# EAGLE board parts_servo (EAGLE 6.5.0)
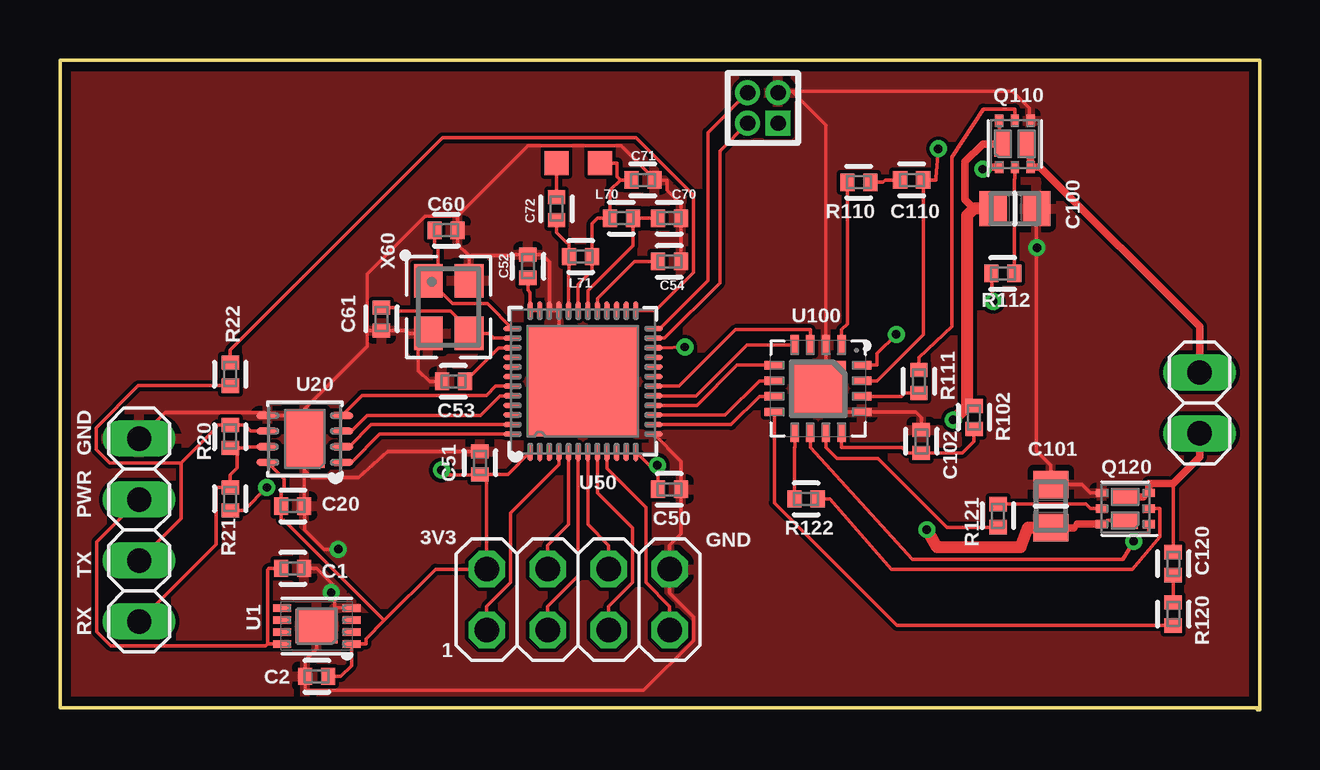
[diagram p0: board, top side]
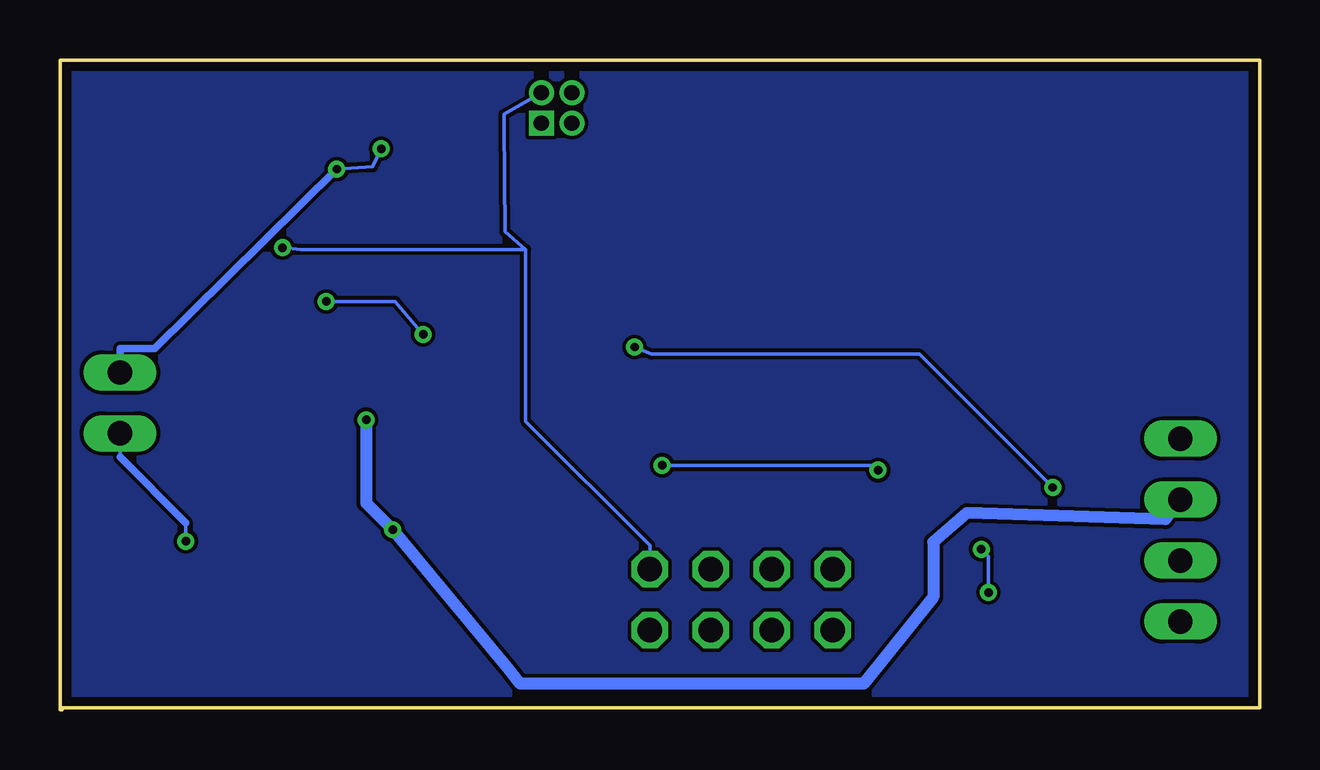
[diagram p1: board, bottom side, seen from below]

Size 50 x 27.1 mm. Coordinates in mm from the lower left corner, seen from the top.
Outline: 50,0.2 50,0.1 0,0.1 0,27.1 50,27.1 50,0 49.9,0
Copper layers (1*16): Top 0.0356mm / dielectric 1.5011mm / Bottom 0.0356mm
Design rules "LaenPCBOrder": minimum track width 6mil, minimum drill 13mil, track to track 6mil, track to pad 6mil, pad to pad 6mil, via to via 6mil, smd to smd 6mil, copper to edge 15mil, drill to drill 6mil, minimum pad ring 7mil, minimum via ring 7mil, stop-mask expansion 3mil, vias tented up to drill 0mil, thermal gap 10mil

## Footprints (pad centres in the part's own frame; a part is rotated, then mirrored left to right if it is on the bottom)
0402-B = smd 0.59 x 0.72: 1 -0.48,0; 2 0.48,0
0805-B = smd 1.15 x 1.45: 1 -0.9,0; 2 0.9,0
1X04 = drill 1.016 long: 1 -3.81,0; 2 -1.27,0; 3 1.27,0; 4 3.81,0
2X04 = drill 1.016 octagon: 1 -3.81,-1.27; 2 -3.81,1.27; 3 -1.27,-1.27; 4 -1.27,1.27; 5 1.27,-1.27; 6 1.27,1.27; 7 3.81,-1.27; 8 3.81,1.27
1X02 = drill 1.016 long: 1 -1.27,0; 2 1.27,0
PINHEADER-2X2-0.05_IN = drill 0.635 pad 1.04 square: 1 -0.635,-0.635 | drill 0.635 pad 1.04: 2 -0.635,0.635; 3 0.635,-0.635; 4 0.635,0.635
DFN-6(2X2)+2EP(TRANSISTOR) = smd 0.5 x 0.35: 1 -0.975,0.65; 2 -0.975,0; 3 -0.975,-0.65; 4 0.975,-0.65; 5 0.975,0; 6 0.975,0.65 | smd 1.05 x 0.72: P7 0,0.49; P8 0,-0.49
TESTPOINT-(1X1)CREAMED = smd 1 x 1: TP 0,0
DFN-8(2X3)+EP = smd 0.75 x 0.3: 1 -1.45,0.75; 2 -1.45,0.25; 3 -1.45,-0.25; 4 -1.45,-0.75; 5 1.45,-0.75; 6 1.45,-0.25; 7 1.45,0.25; 8 1.45,0.75 | smd 1.75 x 1.45: PAD 0,0
DFN-8(3X3)+EP = smd 0.95 x 0.3: 1 -1.55,0.975; 2 -1.55,0.325; 3 -1.55,-0.325; 4 -1.55,-0.975; 5 1.55,-0.975; 6 1.55,-0.325; 7 1.55,0.325; 8 1.55,0.975 | smd 1.65 x 2.4: PAD 0,0
DFN-48(6X6)+EP = smd 0.75 x 0.2: 1 -2.95,2.2; 2 -2.95,1.8; 3 -2.95,1.4; 4 -2.95,1; 5 -2.95,0.6; 6 -2.95,0.2; 7 -2.95,-0.2; 8 -2.95,-0.6; 9 -2.95,-1; 10 -2.95,-1.4; 11 -2.95,-1.8; 12 -2.95,-2.2; 25 2.95,-2.2; 26 2.95,-1.8; 27 2.95,-1.4; 28 2.95,-1; 29 2.95,-0.6; 30 2.95,-0.2; 31 2.95,0.2; 32 2.95,0.6; 33 2.95,1; 34 2.95,1.4; 35 2.95,1.8; 36 2.95,2.2 | smd 0.2 x 0.75: 13 -2.2,-2.95; 14 -1.8,-2.95; 15 -1.4,-2.95; 16 -1,-2.95; 17 -0.6,-2.95; 18 -0.2,-2.95; 19 0.2,-2.95; 20 0.6,-2.95; 21 1,-2.95; 22 1.4,-2.95; 23 1.8,-2.95; 24 2.2,-2.95; 37 2.2,2.95; 38 1.8,2.95; 39 1.4,2.95; 40 1,2.95; 41 0.6,2.95; 42 0.2,2.95; 43 -0.2,2.95; 44 -0.6,2.95; 45 -1,2.95; 46 -1.4,2.95; 47 -1.8,2.95; 48 -2.2,2.95 | smd 4.6 x 4.6: PAD 0,0
QFN-16(4X4)+EP = smd 0.8 x 0.35: 1 -1.825,0.975; 2 -1.825,0.325; 3 -1.825,-0.325; 4 -1.825,-0.975; 9 1.825,-0.975; 10 1.825,-0.325; 11 1.825,0.325; 12 1.825,0.975 | smd 0.35 x 0.8: 5 -0.975,-1.825; 6 -0.325,-1.825; 7 0.325,-1.825; 8 0.975,-1.825; 13 0.975,1.825; 14 0.325,1.825; 15 -0.325,1.825; 16 -0.975,1.825 | smd 2.3 x 2.3: PAD 0,0
CRYSTAL-3.2X2.5(4_TERMINAL) = smd 1.4 x 1.2: 1 -1.1,-0.85; 2 1.1,-0.85; 3 1.1,0.85; 4 -1.1,0.85

## Placement (x,y rotation side)
C1  1  [0402-B]  9.7,5.9 0 top
C2  1  [0402-B]  10.7,1.4 180 top
C20  0.1  [0402-B]  9.7,8.5 0 top
C50  0.1  [0402-B]  25.4,9.2 0 top
C51  0.1  [0402-B]  17.5,10.3 90 top
C52  .001  [0402-B]  19.5,18.5 90 top
C53  0.1  [0402-B]  16.4,13.7 180 top
C54  .047  [0402-B]  25.4,18.7 0 top
C60  8pF  [0402-B]  16.1,20 0 top
C61  8pF  [0402-B]  13.4,16.3 270 top
C70  .0022  [0402-B]  25.4,20.5 0 top
C71  np  [0402-B]  24.3,22.1 0 top
C72  2.2pF  [0402-B]  20.7,20.9 90 top
C100  10  [0805-B]  39.8,20.9 0 top
C101  10  [0805-B]  41.3,8.5 90 top
C102  1  [0402-B]  35.9,11.2 90 top
C110  1  [0402-B]  35.5,22.1 0 top
C120  1  [0402-B]  46.4,6.1 90 top
JP1  I/O  [1X04]  3.3,7.5 270 top
JP2  Sensor  [2X04]  21.6,4.6 0 top
JP3  Motor  [1X02]  47.5,12.8 90 top
JP4  SWD  [PINHEADER-2X2-0.05_IN]  29.3,25.1 90 top
L70  10nH  [0402-B]  23.4,20.5 0 top
L71  4.7nH  [0402-B]  21.7,18.9 0 top
Q110  PMDPB28UN  [DFN-6(2X2)+2EP(TRANSISTOR)]  39.8,23.6 90 top
Q120  PMDPB28UN  [DFN-6(2X2)+2EP(TRANSISTOR)]  44.4,8.4 180 top
R20  120(np)  [0402-B]  7.1,11.4 90 top
R21  4.7k(np)  [0402-B]  7.1,8.8 270 top
R22  4.7k(np)  [0402-B]  7.1,14 90 top
R102  2.2  [0402-B]  38.1,12.2 90 top
R110  1  [0402-B]  33.3,22 0 top
R111  0  [0402-B]  35.8,13.7 90 top
R112  2.2  [0402-B]  39.3,18.2 0 top
R120  1  [0402-B]  46.4,4 90 top
R121  0  [0402-B]  39.1,8.1 90 top
R122  2.2  [0402-B]  31.1,8.8 0 top
TP1  ANT1  [TESTPOINT-(1X1)CREAMED]  22.5,22.8 90 top
TP2  ANT_FEED  [TESTPOINT-(1X1)CREAMED]  20.7,22.8 90 top
U1  MCP1703-3302  [DFN-8(2X3)+EP]  10.7,3.5 180 top
U20  sn65hvd72  [DFN-8(3X3)+EP]  10.2,11.3 180 top
U50  nRF51822  [DFN-48(6X6)+EP]  21.8,13.7 90 top
U100  RT9625A  [QFN-16(4X4)+EP]  31.6,13.4 270 top
X60  CX3225GB16000P0HPQCC  [CRYSTAL-3.2X2.5(4_TERMINAL)]  16.2,16.8 270 top

## Library data of the parts
C1 C100 C101 = rcl_custom; VOLTAGE: 10V
C2 C20 C50-C54 C60 C61 C70-C72 C102 C110 C120 L70 L71 R20-R22 R102 R110-R112 R120-R122 = rcl_custom
JP1-JP3 = pinhead
JP4 Q110 Q120 TP1 TP2 U20 U100 = parts_servo
U1 = parts_servo; VOUT: 3.3V
U50 = parts_servo; SWDIO: (nRST)
X60 = parts_servo; FREQUENCY: 16MHz

## Nets
3.3V: C2.1 C20.1 C50.1 C51.1 JP2.2 U1.1 U20.8 U50.1 U50.12
ANT1: C71.1 L70.1 L71.2 TP1.TP U50.31
ANT2: C72.1 L71.1 U50.32
ANT_FEED: C72.2 TP2.TP
AVDD: C52.1 U50.35 U50.36
BOOT1: R120.1 U100.8
BOOT1_SNUB: C120.1 R120.2
BOOT1_SNUB1: C110.1 R110.2
BOOT2: R110.1 U100.1
D1/TX: JP1.3 R20.2 R22.1 U20.6
D2/RX: JP1.4 R20.1 R21.1 U20.7
DEC1: C53.1 U50.39
DEC2: C54.1 U50.29
DIFFERENTIAL_INPUT: U20.1 U50.48
DIFFERENTIAL_INPUT_EN: U20.2 U50.47
DIFFERENTIAL_OUTPUT: U20.4 U50.43
DIFFERENTIAL_OUTPUT_EN: U20.3 U50.44
GND: C1.2 C2.2 C20.2 C50.2 C51.2 C52.2 C53.2 C54.2 C60.2 C61.2 C70.2 C71.2 C100.2 C101.2 C102.2 JP1.1 JP2.8 JP4.3 Q110.4 Q120.4 U1.4 U1.PAD U20.5 U20.PAD U50.13 U50.33 U50.34 U50.PAD U100.2 U100.13 U100.PAD X60.2 X60.4
HSCLK_IN: C60.1 U50.37 X60.1
HSCLK_OUT: C61.1 U50.38 X60.3
LGATE1: R121.1 U100.11
LGATE2: R111.1 U100.14
MOTOR1: C120.2 JP3.1 Q120.1 Q120.3 Q120.P8 U100.10
MOTOR2: C110.2 JP3.2 Q110.1 Q110.3 Q110.P8 U100.15
POWER_IN: C1.1 C100.1 C101.1 JP1.2 Q110.6 Q110.P7 Q120.6 Q120.P7 R102.2 U1.8
PWM1: U50.15 U100.6
PWM1_EN: U50.16 U100.5
PWM2: U50.18 U100.3
PWM2_EN: U50.17 U100.4
PWM_POR: U50.14 U100.7
PWM_VCC: C102.1 R102.1 U100.12
QLGATE1: Q120.5 R121.2
QLGATE2: Q110.5 R111.2
QUGATE1: Q120.2 R122.2
QUGATE2: Q110.2 R112.2
SENSOR1: JP2.1 U50.4
SENSOR2: JP2.3 U50.6
SENSOR3: JP2.4 U50.5
SENSOR4: JP2.5 U50.8
SENSOR5: JP2.6 U50.7
SENSOR6: JP2.7 U50.9
SWDCLK: JP4.4 U50.24
SWDIO: JP4.2 U50.23
UGATE1: R122.1 U100.9
UGATE2: R112.1 U100.16
UNIPOLAR_INPUT: R21.2 U50.22
UNIPOLAR_OUTPUT: R22.2 U50.25
VDD_PA: C70.1 L70.2 U50.30

## Tracks (layer width: path | path; a pad name or v marks a point on that pad's centre or on a via)
3.3V  (via drill 0.35 pad 0.64)
  Top 0.152: 13.52,3.73 15.65,5.87 16.8,5.87 JP2.2 17.79,6.86 17.79,9.82 | 13.52,3.73 12.75,2.97 12.75,2.75 U1.1 12.15,1.85 11.7,1.4 C2.1 | 13.52,3.73 9.34,7.91 9.22,7.91 C20.1 9.22,9.09 9.34,9.21 9.34,9.64 U20.8 | 19.6,10.84 U50.1 18.67,9.82 17.79,9.82 | 24,10.79 U50.12 24.88,9.88 | 17.79,9.82 C51.1 17.5,9.8 16.1,9.8 16,9.9 15.9,9.9 v15.9,10 | C50.1 24.92,9.83 24.88,9.88 | v24.9,10.2 24.9,9.9 24.88,9.88
  Bottom 0.152: v15.9,10 16.1,10.2 v24.9,10.2
ANT1
  Top 0.152: U50.31 21.6,17.73 22.18,18.31 L71.2 22.18,20.28 22.4,20.5 L70.1 22.92,21.09 22.92,21.66 23.36,22.1 | TP1.TP 23.23,22.8 23.23,22.23 23.36,22.1 | 23.36,22.1 23.4,22.1 C71.1
ANT2
  Top 0.152: U50.32 21.2,18.29 21.22,18.31 L71.1 21.22,19.49 21.11,19.49 20.7,19.9 C72.1
ANT_FEED
  Top 0.152: TP2.TP C72.2
AVDD
  Top 0.152: U50.35 U50.36 19.6,17.4 19.5,17.5 C52.1
BOOT1
  Top 0.152: U100.8 29.77,8.63 34.89,3.52 R120.1
BOOT1_SNUB
  Top 0.152: R120.2 C120.1
BOOT1_SNUB1
  Top 0.152: R110.2 34.3,22 34.4,22.1 C110.1
BOOT2
  Top 0.152: U100.1 32.57,15.85 32.82,16.1 R110.1
D1/TX
  Top 0.152: 5.06,10.29 2.08,10.29 1.52,10.86 1.52,11.77 3.27,13.52 R22.1 | 5.06,10.29 6.51,11.75 6.51,11.88 R20.2 7.69,11.88 7.94,11.62 U20.6 | 5.06,10.29 5.06,7.99 JP1.3
D2/RX
  Top 0.152: 7.39,10.92 7.39,10.1 7.1,9.8 R21.1 6.51,9.28 6.51,6.9 JP1.4 | 7.39,10.92 7.69,10.92 7.74,10.97 U20.7 | R20.1 7.39,10.92
DEC1
  Top 0.152: U50.39 18.28,15.1 C53.1
DEC2
  Top 0.152: C54.1 23.95,18.7 22.4,17.15 U50.29
DIFFERENTIAL_INPUT
  Top 0.152: U50.48 13.33,11.5 12.15,10.32 U20.1
DIFFERENTIAL_INPUT_EN
  Top 0.152: U50.47 12.97,11.9 12.05,10.97 U20.2
DIFFERENTIAL_OUTPUT
  Top 0.152: U50.43 18.16,13.5 17.77,13.11 12.59,13.11 U20.4
DIFFERENTIAL_OUTPUT_EN
  Top 0.152: U50.44 18.35,13.1 17.52,12.28 12.8,12.28 12.15,11.62 11.95,11.62 U20.3
GND  (via drill 0.35 pad 0.64, 0.35 pad 0.69)
  Top 0.152: v40.73,19.27 40.7,19.95 | 24.67,11.5 U50.13 25.88,10.37 C50.2 25.88,7.33 25.41,6.86 JP2.8 25.41,4.88 26.4,3.89 26.4,2.88 24.33,0.81 10.22,0.81 C2.2 10.22,2.07 10.7,2.55 U1.PAD 11.45,4.25 | C51.2 13.65,10.78 12.46,9.69 10.5,9.69 10.18,10 | 40.7,19.95 40.7,10.8 41.3,10.2 C101.2 42.6,9.4 42.95,9.05 Q120.4 | 31.71,13.51 31.92,13.72 U100.2 31.92,18.18 31.92,24.38 30.5,25.8 | U100.PAD 31.71,13.51 | 31.71,13.51 32.8,12.43 U100.13 35.68,12.43 35.9,12.2 C102.2 | 12.81,15.82 | 12.81,15.82 12.81,15.15 9.94,12.28 | 9.94,12.28 9.94,11.56 U20.PAD 10.18,11.28 10.18,10 | 9.94,12.28 U20.5 8.52,12.4 4.39,12.4 JP1.1 | 16.58,20.59 19.52,23.53 23.38,23.53 24.78,22.13 C71.2 25.3,22.1 25.3,21.66 25.88,21.09 C70.2 C54.2 | 17.05,18.94 16.58,19.41 C60.2 16.58,20.59 | X60.4 17.05,18.94 | 17.05,18.94 18.87,18.94 18.91,18.98 C52.2 20.09,18.98 20.4,18.67 U50.34 U50.33 20.8,16.55 20.8,15.1 | 16.58,20.59 15.22,20.59 12.81,18.18 12.81,15.82 | 12.81,15.82 C61.2 14.4,15.82 14.52,15.7 14.94,15.7 | C53.2 15.4,13.7 14.94,14.16 14.94,15.7 | X60.2 14.94,15.7 | C1.2 10.7,5.9 11.45,5.15 11.45,4.9 | C100.2 40.7,19.95 | U1.4 11.45,4.25 | 11.45,4.25 11.45,4.9 | 10.18,10 C20.2 10.2,8.5 10.2,7.5 11,6.7 v11.6,6.7 | v11.3,4.9 11.4,4.9 11.45,4.9 | Q110.4 40.42,24.57 40.4,24.6 40.4,25.1 39.7,25.8 30.5,25.8 | 30.5,25.8 30,25.8 JP4.3
  Top 0.406: 20.8,15.1 21.8,15.1 U50.PAD
  Bottom 0.152: 30.58,19.2 39.95,19.2 v40.73,19.27 | 30.58,19.2 31.45,19.93 31.5,24.4 31.5,24.84 JP4.3 | 30.58,19.2 30.58,12.03 25.41,6.86 JP2.8 | v11.6,6.7 11.3,6.4 v11.3,4.9
  pour Top: 0,27.1 50,27.1 50,-0.2 0,-0.2 0,27
HSCLK_IN
  Top 0.152: U50.37 17.82,16.93 16.37,16.93 15.76,17.54 15.76,17.9 | 15.76,17.9 15.76,19.27 15.62,19.41 C60.1 | X60.1 15.76,17.9
HSCLK_OUT
  Top 0.152: C61.1 13.99,16.78 14.14,16.63 16.29,16.63 17.22,15.7 | X60.3 17.22,15.7 | 17.22,15.7 17.46,15.7 17.88,15.7 18.08,15.5 U50.38
LGATE1
  Top 0.152: U100.11 31.92,10.95 32.39,10.48 34.1,10.48 36.96,7.62 38.51,7.62 R121.1
LGATE2
  Top 0.152: R111.1 35.21,13.22 35.07,13.07 U100.14
MOTOR1  (via drill 0.35 pad 0.69)
  Top 0.152: Q120.1 45.38,7.35 45.06,7.35 v44.75,7.03 44.3,6.29 35.54,6.29 31.27,10.95 U100.10 | 46.41,9.45 46.4,9.45 46.4,7.1 C120.2 | 45.15,8.89 45.31,9.05 Q120.3
  Top 0.305: 46.41,9.45 47.5,10.54 JP3.1 | 46.4,9.45 45.38,9.45 Q120.3 | Q120.P8 45.15,8.89
  Bottom 0.152: 44.75,7.79 v44.75,7.03 | v44.75,7.03 | JP3.1 47.5,10.54
  Bottom 0.305: 47.5,10.54 44.75,7.79
MOTOR2  (via drill 0.35 pad 0.69)
  Top 0.152: v38.46,22.55 38.48,22.62 | v36.61,23.4 36.5,22.19 36.5,22.1 C110.2 35.98,15.65 34.05,13.72 U100.15 | Q110.3 40.45,22.67 | 40.45,23.1 40.29,23.26 Q110.P8
  Top 0.305: Q110.3 40.85,22.62 47.5,15.98 JP3.2 | 38.48,22.62 Q110.1 | 40.45,22.67 40.45,23.1
  Bottom 0.152: v36.61,23.4 36.96,22.65 v38.46,22.55
  Bottom 0.305: JP3.2 47.5,15.06 46.05,15.06 v38.46,22.55
N$1
  pour Bottom: 0,27.2 49.8,27.2 49.8,-0.1 0.1,-0.1 0.1,27.1
POWER_IN  (via drill 0.35 pad 0.69)
  Top 0.152: Q110.P7 39.15,23.6 39.15,24.1 Q110.6 | R102.2 37.82,12.68 | 42.25,7.6 42.4,7.75 | Q120.P7 43.65,7.91 43.49,7.75 Q120.6 | JP1.2 1.54,7.01 1.54,3.25 2.11,2.68 8.58,2.68 8.65,2.75 | C1.1 8.7,5.9 8.65,5.85 8.65,2.75 | U1.8 8.65,2.75
  Top 0.305: 39.15,23.6 38.46,23.6 37.73,22.87 37.73,21.27 38.1,20.9 | 42.4,7.75 Q120.6 | C101.1 42.25,7.6
  Top 0.508: v37.24,12.1 37.82,12.68 37.82,20.62 38.1,20.9 C100.1 | v36.13,7.52 36.55,6.8 40.04,6.8 40.35,7.6 C101.1
  Bottom 0.508: v37.24,12.1 37.24,8.62 v36.13,7.52 31.27,1.65 30.81,1.1 16.5,1.1 13.6,4.7 13.6,7 12.21,8.21 3.92,7.95 JP1.2
PWM1
  Top 0.152: U100.6 29.15,13.72 27.72,12.3 U50.15
PWM1_EN
  Top 0.152: U100.5 28.22,14.38 26.54,12.7 U50.16
PWM2
  Top 0.152: U100.3 31.27,15.85 28.16,15.85 25.81,13.5 U50.18
PWM2_EN
  Top 0.152: U100.4 28.64,15.22 26.51,13.1 U50.17
PWM_POR
  Top 0.152: U100.7 29.15,13.07 27.97,11.9 U50.14
PWM_VCC
  Top 0.152: U100.12 32.57,10.95 35.09,10.95 35.31,10.72 C102.1 37.62,10.72 38.1,11.2 R102.1
QLGATE1
  Top 0.152: Q120.5 42.95,8.4 42.77,8.58 R121.2
QLGATE2
  Top 0.152: Q110.5 39.8,25.05 38.48,25.05 37.18,23.06 37.18,15.99 35.8,14.7 R111.2
QUGATE1
  Top 0.152: Q120.2 45.85,8.4 45.85,7.21 44.7,5.86 34.65,5.86 32.1,8.8 R122.2
QUGATE2
  Top 0.152: Q110.2 39.8,22.15 39.78,22.13 R112.2
SENSOR1
  Top 0.152: JP2.1 17.79,4.32 18.78,5.31 18.78,8.22 20.8,10.24 U50.4
SENSOR2
  Top 0.152: JP2.3 20.33,4.32 21.6,5.59 U50.6
SENSOR3
  Top 0.152: JP2.4 20.33,6.86 21.2,7.73 U50.5
SENSOR4
  Top 0.152: JP2.5 22.87,4.32 23.86,5.31 23.86,7.58 22.4,9.04 U50.8
SENSOR5
  Top 0.152: JP2.6 22.87,6.86 22,7.73 U50.7
SENSOR6
  Top 0.152: JP2.7 25.41,4.32 24.42,5.31 24.42,8.45 22.8,10.07 U50.9
SWDCLK
  Top 0.152: U50.24 25,15.9 27,17.9 27,24.07 JP4.4
SWDIO
  Top 0.152: U50.23 25.2,15.5 27.5,17.8 27.5,23.3 JP4.2
UGATE1
  Top 0.152: U100.9 30.62,10.95 30.62,10.94 R122.1
UGATE2  (via drill 0.35 pad 0.69)
  Top 0.152: U100.16 34.05,14.38 34.05,14.86 v34.86,15.66 | v38.9,17.03 38.8,18.18 R112.1
  Bottom 0.152: v34.86,15.66 36.03,17.03 v38.9,17.03
UNIPOLAR_INPUT  (via drill 0.35 pad 0.69)
  Top 0.152: U50.22 25.08,15.1 v26.05,15.13 | R21.2 7.69,8.32 7.69,8.35 v8.62,9.28
  Bottom 0.152: v8.62,9.28 14.17,14.83 25.35,14.83 v26.05,15.13
UNIPOLAR_OUTPUT
  Top 0.152: R22.2 7.1,15 15.95,23.85 24.01,23.85 26.4,21.46 26.4,18.23 24.82,16.65 U50.25
VDD_PA
  Top 0.152: U50.30 22,17.48 23.88,19.36 L70.2 24.4,20.5 C70.1

## Text on the board
tNames: GND | PWR | 3V3 | GND | TX | RX | 1